# Altium PCB Power&CH340T.PcbDoc
Units mil, origin at the board's own origin, x right, y up, seen from the top; angles counter-clockwise.
Board outline 1295 x 1295 mil, 2 copper layers (Top Layer, Bottom Layer); 28 components, 23 nets, 119 pads, 61 vias.
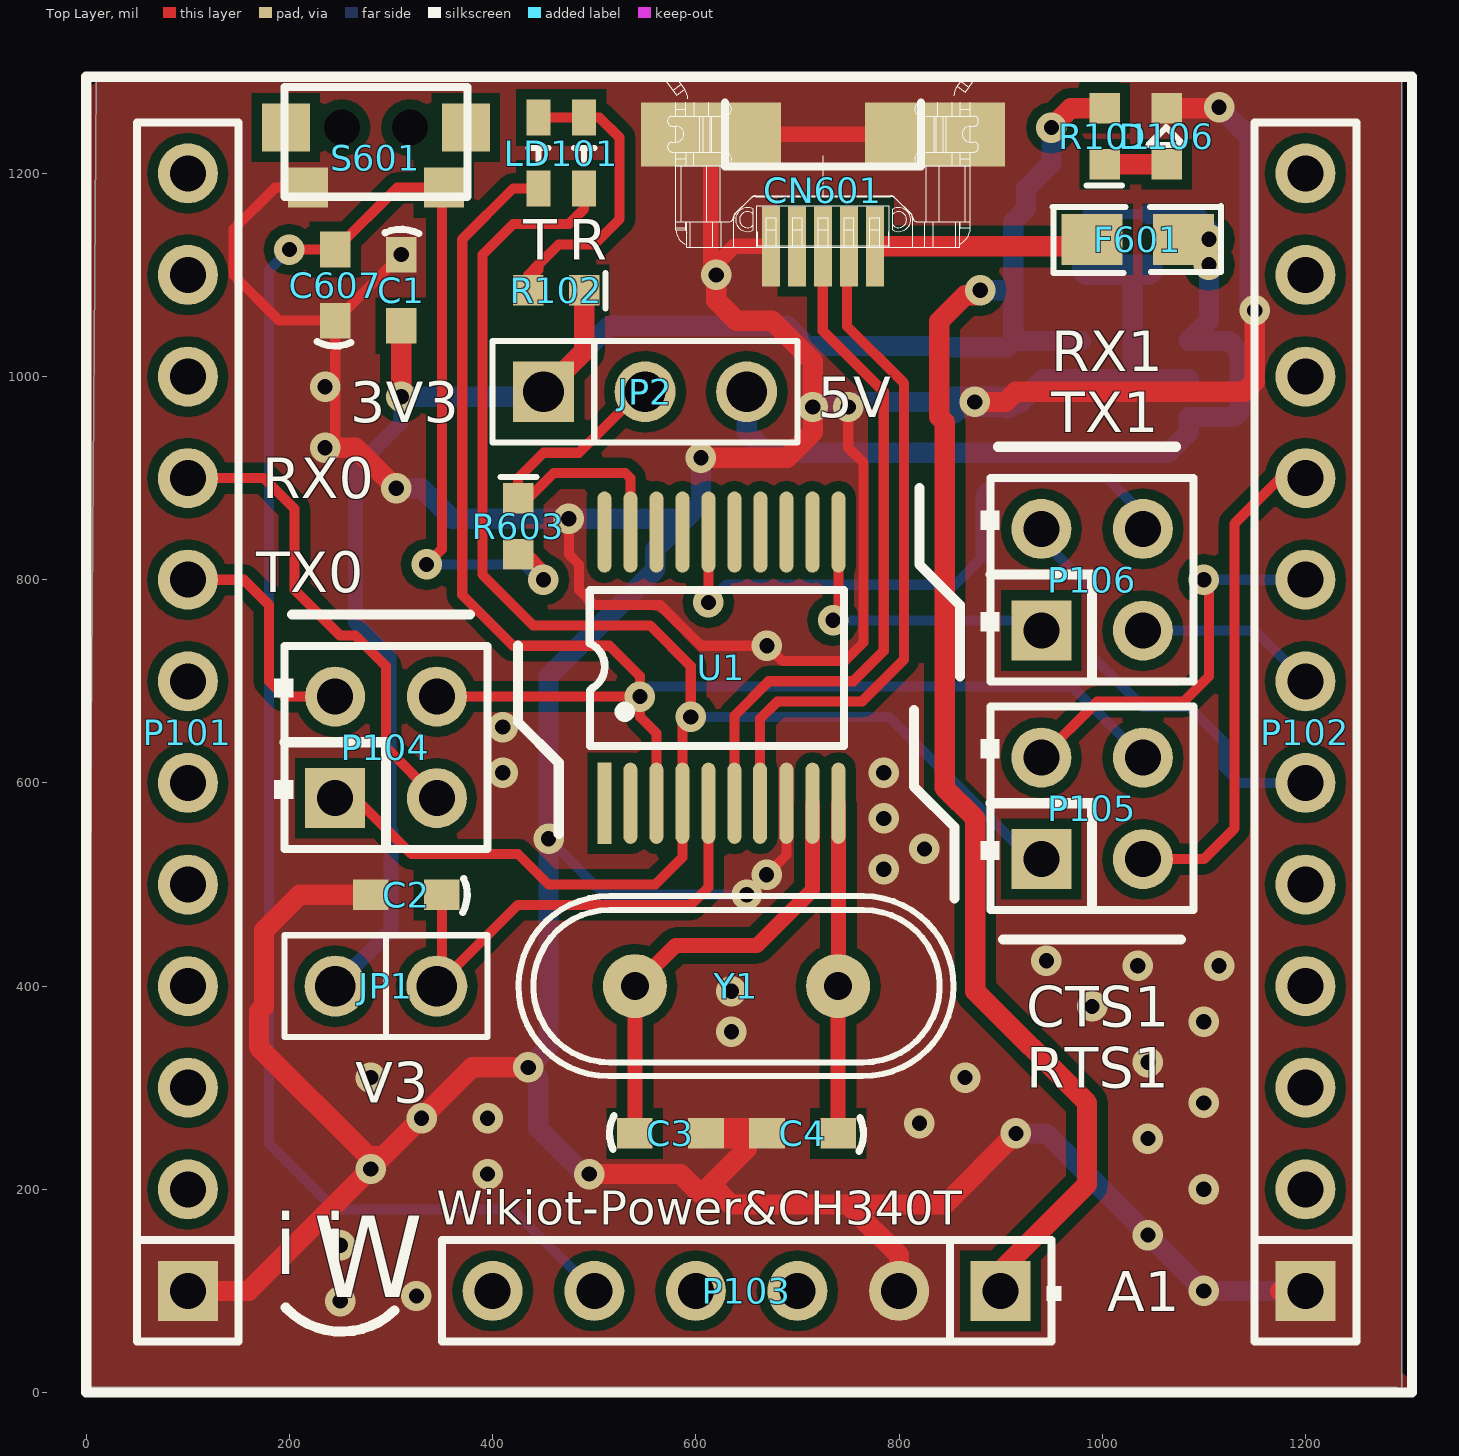
[diagram p0: Top Layer view]
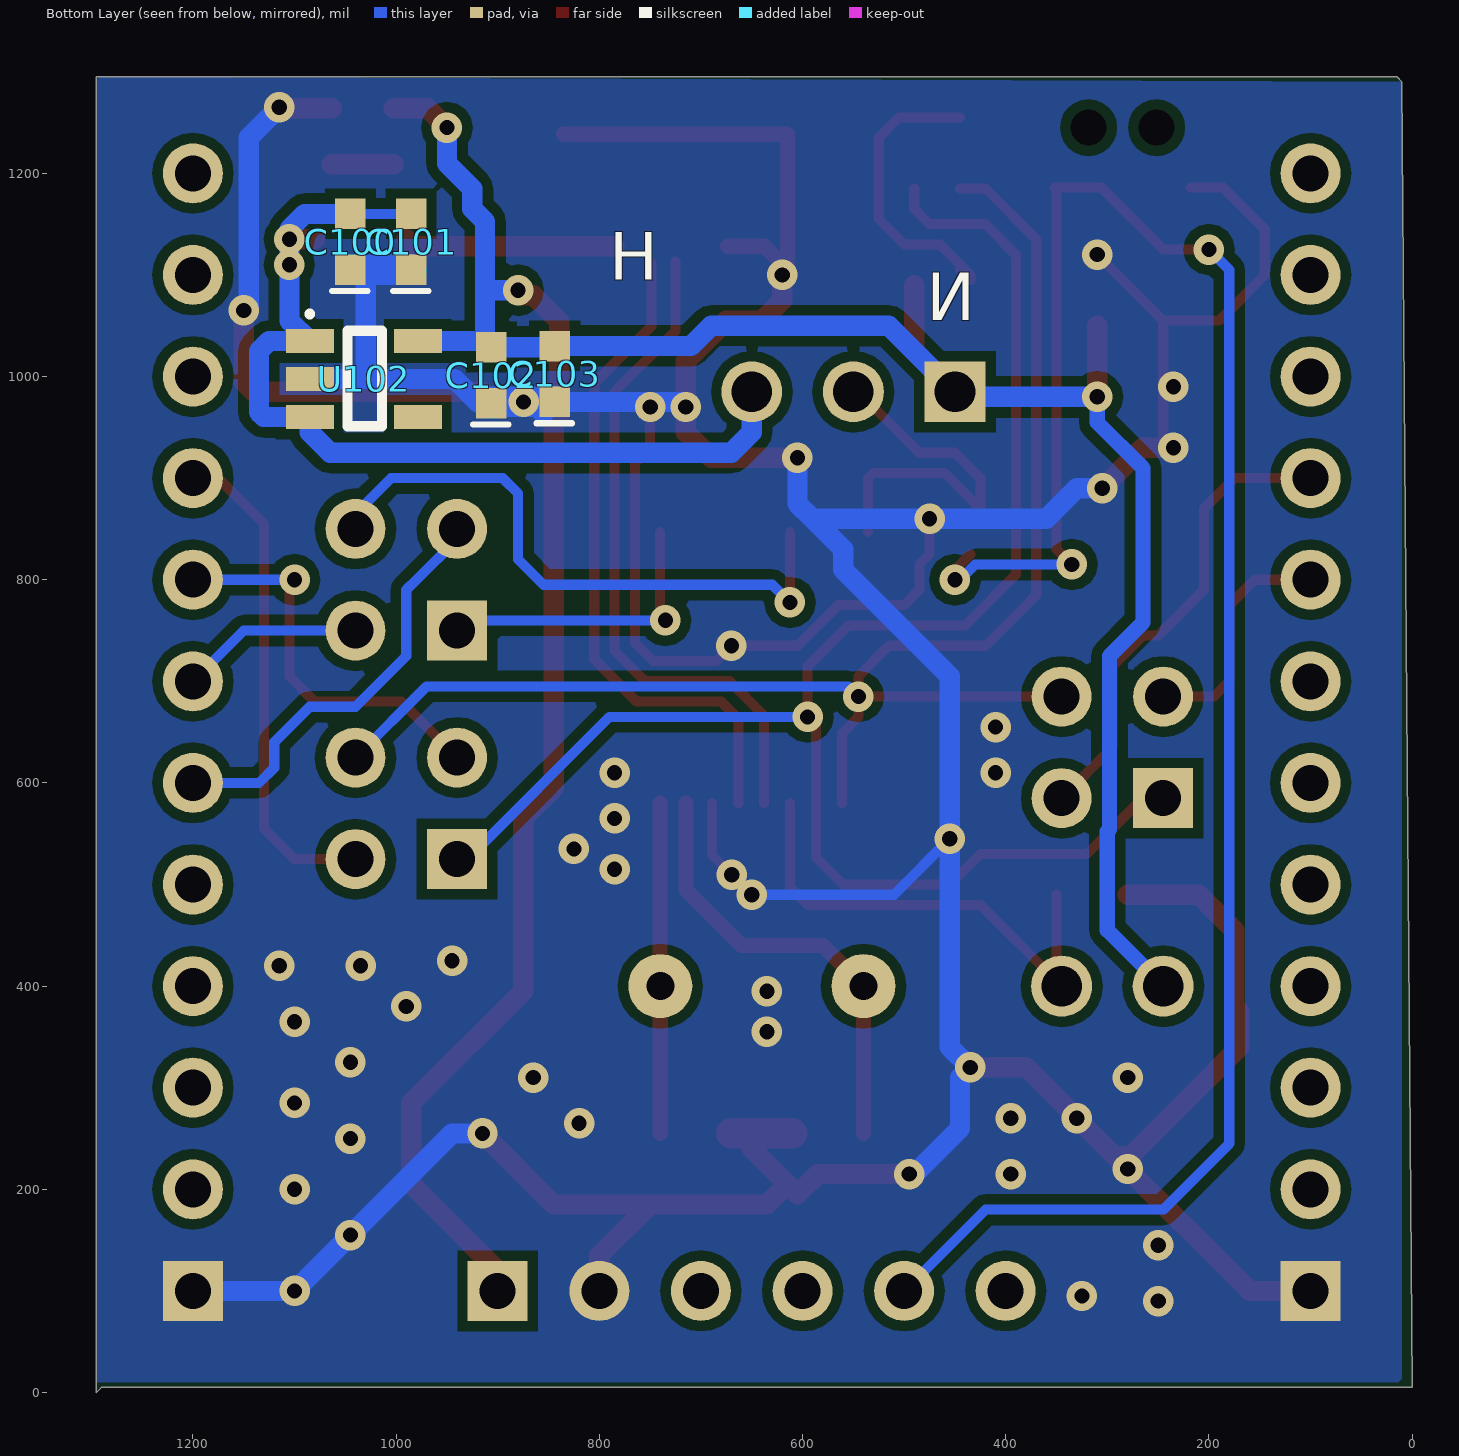
[diagram p1: Bottom Layer view, seen from below]

## Layer stack, top to bottom
Top Solder: solder mask 0.4, Solder Resist, Dk 3.5
Top Layer: signal copper 1.4
Dielectric1: dielectric 12.6, FR-4, Dk 4.8
Bottom Layer: signal copper 1.4
Bottom Solder: solder mask 0.4, Solder Resist, Dk 3.5

## Board outline
10,1290 15,1295 1295,1295 1295,0 1290,5 0,5

## Design rules (kind name [scope] priority, off if disabled: settings)
Clearance [All] p1: gap=10
ComponentClearance [All] p1: gap=10 collisioncheckmode=3 verticalgap=100000 showdistances=FALSE
HoleSize [All] p1: absolutevalues=TRUE maxlimit=1000 minlimit=1 maxpercent=80.000 minpercent=20.000
HoleToHoleClearance [All] p1: gap=0 allowstackedmicrovias=TRUE
MinimumSolderMaskSliver [All] p1: minsoldermaskwidth=0
PlaneConnect [All] p1: planeconnectstyle=Direct reliefexpansion=20 reliefentries=4 reliefconductorwidth=10 reliefairgap=10
PolygonConnect [All] p1: connectstyle=Direct reliefconductorwidth=10 reliefentries=4 polygonreliefangle="90 Angle" airgapwidth=10
RoomDefinition Power&CH340T [InComponentClass('Power&CH340T')] p1: confinementstyle=ConfineIn formatcopy=TRUE lockcomponents=FALSE outline 1305,1295 1.92,1295 1.92,-0.79 1305,-0.79
RoutingVias [All] p1: holewidth=28 width=50 viastyle="Through Hole" minholewidth=10 minwidth=20 maxholewidth=28 maxwidth=50
SilkToSilkClearance [All] p1: silktosilkclearance=0
SilkToSolderMaskClearance SilkscreenOverComponentPads [IsPad] p1: minsilkscreentomaskgap=0 clearancetoexposedcopper=TRUE
SolderMaskExpansion [All] p1: expansion=4
UnpouredPolygon [All] p1: allowunpoured=FALSE
Width [All] p1: maxlimit=10000 minlimit=10 preferedwidth=10
22 further rules are at their usual default settings.

## Components (designator, comment, footprint, x,y, rotation, side; value= is the part's Value field where it differs from the comment)
C1 "Cap" C0603L 310,1085 r270 top
C2 "Cap" C0603L 315,490 r180 top
C3 "Cap" C0603L 575,255 r0 top
C4 "Cap" C0603L 705,255 r180 top
C100 "1uF" 0603M 1045,1105 r90 bottom
C101 "0.1uF" 0603M 985,1105 r90 bottom
C102 "1uF" 0603M 906.44,973.92 r90 bottom
C103 "0.1uF" 0603M 843.8,975 r90 bottom
C607 "1uF" C0603L 245,1090 r90 top
CN601 "USB-Micro" USB-MICRO-Female-Lite 725,1235 r0 top
D106 "RED" 0603pn 1063.36,1208.92 r90 top
F601 "500mA" 0805 1080,1135 r180 top
JP1 "Jumper2-2" SIP2 345,400 r180 top
JP2 "Jumper3" SIP3 450,985 r0 top
LD101 "LTST-C195KGJRKT" 0805-LED-Bi 465,1180 r90 top
P101 "Synio Header-L 12-Pin" HDR1X12 100,100 r90 top locked
P102 "Synio Header-R 12-Pin" HDR1X12 1200,100 r90 top locked
P103 "Synio Power Header 6 Pin" HDR1X6/2.54MM 900,100 r180 top locked
P104 "Header 2X2" HDR2X2/2.54MM 245,585 r0 top
P105 "Header 2X2" HDR2X2/2.54MM 940,525 r0 top
P106 "Header 2X2" HDR2X2/2.54MM 940,750 r0 top
R101 "1K" 0603M 1002.36,1208.92 r90 top
R102 "1K" 0603M 490,1085 r180 top
R603 "10K" 0603M 425,880 r270 top
S601 "RESET" KEY-2x4-SMD 285,1245 r0 top
U1 "CH340T" SSOP20 610,705 r0 top
U102 "LDO" SOT23-5 1085,1035 r270 bottom
Y1 "XTAL" XTAL_49S 640,400 r0 top

## Footprints (in the part's own frame and the unit in brackets; to place one, negate y for a bottom-side part, rotate by r counter-clockwise, add the part's x,y. Pads: shape width x height; smd on the part's side, far side on the other; paste and mask are expansions set on the pad)
0603M [mil]
  rect 30x30 smd: 1(0,0) 2(55,0)
  silkscreen extent -21,-17 -21,18, body extent -5,-15 60,15, height 43
0603pn [mil]
  rect 30x30 smd: 1(0,0) 2(55,0)
  silkscreen extent 19,-17 36,18
0805 [mil]
  rect 60x50 smd: 1(0,0) 2(90,0)
  silkscreen extent -37,-33 129,33
0805-LED-Bi [mm]
  rect 0.9x0.6 smd: 1(0.127,-0.635) 2(0.127,0.508) 3(1.905,0.508) 4(1.905,-0.635)
  silkscreen extent 0.76,-0.89 1.14,0.76, body extent 0.32,-1.02 1.72,0.9, height 1.1
C0603L [mil]
  rect 35x30 smd: 1(-35,0) 2(35,0)
  silkscreen extent -60,-16 -56,18, body extent -31,-16 32,15, height 24
HDR1X6/2.54MM [mm] "Connector; Header; 6 Position"
  rect 1.5x1.5 hole 0.9: 1(0,0)
  round 1.5 hole 0.9: 2(2.54,0) 3(5.08,0) 4(7.62,0) 5(10.16,0) 6(12.7,0)
  silkscreen extent -1.52,-1.27 13.97,1.27
HDR1X12 [mm] "Connector; Header; 12 Position"
  rect 1.5x1.5 hole 0.9: 1(0,0)
  round 1.5 hole 0.9: 2(2.54,0) 3(5.08,0) 4(7.62,0) 5(10.16,0) 6(12.7,0) 7(15.24,0) 8(17.78,0) 9(20.32,0) 10(22.86,0) 11(25.4,0) 12(27.94,0)
  silkscreen extent -1.27,-1.27 29.21,1.27
HDR2X2/2.54MM [mm] "Connector; Header; 2x2 Position"
  rect 1.5x1.5 hole 0.9: 1(0,0)
  round 1.5 hole 0.9: 2(0,2.54) 3(2.54,0) 4(2.54,2.54)
  silkscreen extent -1.52,-1.27 3.81,3.81
KEY-2x4-SMD [mm] "6.8MM,2.8MM,SMD"
  rect 1.2x1.2 smd: 0(-2.25,0) 0(2.25,0)
  rect 1x1 smd: 1(-1.7,-1.5) 2(1.7,-1.5)
  round 0.8 hole 0.9 unplated: MH1(0.85,0) MH2(-0.85,0)
  silkscreen extent -2.29,-1.73 2.29,1.02, body extent -2.28,-1.6 2.29,0.94, height 1.1
SIP2 [mil]
  round 60 hole 40: 1(0,0) 2(100,0)
  silkscreen extent -50,-50 150,50
SIP3 [mil]
  rect 60x60 hole 40: 1(0,0)
  round 60 hole 40: 2(100,0) 3(200,0)
  silkscreen extent -50,-50 250,50
SOT23-5 [mm]
  rect 0.6x1.2 smd: 1(0,0) 2(0.95,0) 3(1.9,0) 4(1.9,2.7) 5(0,2.7)
  silkscreen extent -0.69,0 2.13,1.8, body extent -0.32,0.7 2.35,2.1, height 1.1
SSOP20 [mm]
  rect 0.35x2.032 smd: 1(-2.54,-3.175)
  oval 0.35x2.032 smd: 2(-1.89,-3.175) 3(-1.24,-3.175) 4(-0.59,-3.175) 5(0.06,-3.175) 6(0.71,-3.175) 7(1.35,-3.175) 8(2.01,-3.175) 9(2.66,-3.175) 10(3.31,-3.175) 11(3.31,3.606) 12(2.66,3.606) 13(2.01,3.606) 14(1.36,3.606) 15(0.71,3.606) 16(0.06,3.606) 17(-0.59,3.606) 18(-1.24,3.606) 19(-1.89,3.606) 20(-2.54,3.606)
  silkscreen extent -2.91,-1.75 3.45,2.15
USB-MICRO-Female-Lite [mm] "Connector; USB2.0, Type B, SM; 5 Position; Right Angle"
  rect 3.5x1.6 smd: 0(-2.802,0.088) 0(2.798,0.088)
  rect 0.45x2 smd: 1(1.298,-2.714) 2(0.648,-2.714) 3(-0.002,-2.714) 4(-0.652,-2.714) 5(-1.302,-2.714)
  silkscreen extent -3.92,-2.74 3.88,1.65
XTAL_49S [mm] "Hole 1.6mm"
  round 1.6 hole 0.7: 1(2.54,0) 2(-2.54,0)
  silkscreen extent -5.45,-2.25 5.42,2.25

## Part data
C1 C2 C3 C4: "Capacitor"
C100 C101 C102 C103 C607: library part Cap, "Capacitor"
D106: library part LED0, "Typical INFRARED GaAs LED"
F601: library part "Fuse 1", "Fuse"
JP1: "Jumper2"
LD101: "Avago, HSMF-A203 Bi-Color LED"
P101: "Synio Header-L, 12-Pin"
P102: "Synio Header-R, 12-Pin"
P104 P105 P106: "Header, 2-Pin, Dual row"
R101 R102 R603: library part Res2, "Resistor"
S601: library part SW-PB, "Switch"
U102: library part LDO-SOT23-5, "General LDO SOT23-5"
Y1: "Crystal Oscillator"

## Via types
v1: diameter 30, hole 15, Top Layer to Bottom Layer, 61 vias

## Nets (pads, with @x,y where several pads share a name; then routed paths per layer and width w, separated by ;. In a path a pad name is that pad's centre, name@x,y a point inside that pad or via, vN(x,y) a via of type N, cw(c..) or ccw(c..) an arc to the next point about the centre after c; other vN are vias at no path point)
CH_CTS: P106.1 U1.11 | length 298.3
  Top Layer w10: v1(735,760) 740.32,765.32 U1.11
  Bottom Layer w10: v1(735,760) 930,760 P106.1
CH_RTS: P106.4 U1.16 | length 615.2
  Top Layer w10: v1(612.36,777.64) U1.16
  Bottom Layer w10: v1(612.36,777.64) 629.72,795 855,795 880,820 880,885 895,900 1005,900 1040,865 P106.4
CH_RX: LD101.1 P104.1 P105.1 U1.4 | length 1688.6
  Top Layer w10: P104.1 265,585 320,530 425,530 455,500 560,500 586.77,526.77 U1.4 586.77,660 591.77,655 595,658.23 v1(595,665) 595,715 555,755 440,755 390,805 390,1120 420,1150 475,1150 490,1165 LD101.1
  Bottom Layer w10: v1(595,665) 790,665 930,525 P105.1
CH_TX: LD101.2 P104.4 P105.4 U1.3 | length 1513.7
  Top Layer w10: P104.4 v1(545,685) ; LD101.2 420,1185 370,1135 370,785 420,735 515,735 545,705 v1(545,685) ; U1.3 561.18,648.82 545,665 v1(545,685)
  Bottom Layer w10: v1(545,685) 555,695 970,695 P105.4
CH_VDD: JP2.2 R603.1 U1.19 | length 352.1
  Top Layer w10: U1.19 535.59,900 530.59,905 460,905 425,870 425,900 450,925 485,925 535,975 JP2.2@535.59,974.41
CTS1: P102.7 P106.3 | length 180.7
  Bottom Layer w10: P106.3 1150,750 P102.7
D3V3: C1.2 C102.2 C103.2 JP1.2 JP2.1 P103.1 R101.2 R102.1 U102.5 | length 2959.8
  Top Layer w20: v1(310,980) C1.2 ; JP2.1 490,1025 R102.1@490,1090 ; v1(880,1085) 875,1080 865,1080 839.58,1054.58 839.58,1034.58 839.58,960.5 845,955.08 845,595 875,565 875,395 985,285 985,205 900,120 P103.1 ; v1(950,1245) 968.92,1263.92 R101.2
  Bottom Layer w15: JP1.2 300,455 300,552.22 297.97,554.25 297.97,725 265,757.97 265,910 310,955 v1(310,980)
  Bottom Layer w20: v1(310,980) 445,980 JP2.1 515,1050 690,1050 710,1030 C103.2 844.87,1028.92 C102.2 C102.2@912.52,1035 ; v1(880,1085) 907.52,1085 912.52,1080 ; v1(950,1245) 950,1210 925,1185 925,1165 912.52,1152.52 912.52,1080 ; U102.5 C102.2@912.52,1035 ; C102.2@912.52,1035 912.52,1080
D5V: C100.2 C101.2 F601.1 JP2.3 U102.1 U102.3 | length 942.4
  Top Layer w20: F601.1 v1(1105,1135)
  Bottom Layer w10: C101.2 C100.2
  Bottom Layer w20: JP2.3 650,945 670,925 1065,925 1085,945 U102.3 1130.2,960.2 1135,965 1135,1025 1125,1035 U102.1 1105,1055 v1(1105,1135) 1105,1145 1090,1160 C100.2
  other v1: 1105,1110
D+: CN601.3 U1.6 | length 667.7
  Top Layer w10: U1.6 637.95,666.24 671.72,700 755,700 785,730 785,985 724.94,1045.06 CN601.3@724.94,1113.14
D-: CN601.2 U1.7 | length 664.7
  Top Layer w10: U1.7 663.15,663.15 680,680 763.28,680 805,721.72 805,993.28 748.8,1049.49 748.8,1111.41 CN601.2@750.53,1113.14
GND: C1.1 C2.2 C3.2 C4.2 C100.1 C101.1 C102.1 C103.1 C607.1 CN601.0 CN601.5 D106.2 P101.1 P102.1 P103.2 S601.1 U1.8 U102.2 | length 6485
  Top Layer w10: S601.1 185.94,1185.94 145,1145 145,1100 190,1055 C607.1 ; v1(235,930) 245,940 C607.1 ; v1(310,1120) C607.1 ; v1(475,860) 475,825 485,815 485,790 500,775 565,775 605,735 v1(670,735) 685,720 746.72,720 765,738.28 765,915 750,930 v1(750,970) ; v1(650,490) 689.13,529.13 U1.8
  Top Layer w15: CN601.5 637.54,1128.14 614.7,1105.3 614.7,1238.46 CN601.0@835.17,1238.46
  Top Layer w20: P101.1 160,100 292.5,232.5 ; v1(235,930) 265,930 v1(305,890) ; C2.2 210,490 175,455 175,380 170,375 170,340 277.5,232.5 292.5,232.5 ; v1(435,320) 380,320 292.5,232.5 ; v1(495,215) 585,215 605,195 615,205 ; v1(605,920) 690,920 715,945 v1(715,970) 715,1015 675,1055 640,1055 620,1075 v1(620,1100) ; 650,255 650,240 615,205 ; P103.2 800,135 750,185 ; v1(874.58,975) 905,975 915,985 1140,985 1150,995 v1(1150,1065) ; v1(915,255) 845,185 750,185 ; D106.2 1113.92,1263.92 v1(1115,1265) ; P102.1@1175,100 P102.1 ; 615,205 635,185 750,185
  Top Layer w30: C3.2 650,255 C4.2
  Bottom Layer w10: v1(455,545) 510,490 v1(650,490)
  Bottom Layer w20: v1(305,890) 330,890 360,860 v1(475,860) 590,860 ; v1(495,215) 490,215 445,260 445,310 v1(435,320) 455,340 v1(455,545) 455,705 560,810 560,830 590,860 ; v1(605,920) 605,875 590,860 ; v1(715,970) 720,975 C103.1 855,963.8 866.2,975 v1(874.58,975) ; C102.1 918.92,973.92 942.6,997.6 1020,997.6 ; v1(915,255) 945,255 v1(1100,100) P102.1 ; C100.1@1030,1105 1030,1007.6 1020,997.6 ; U102.2 1020,997.6 ; v1(1115,1265) 1145,1235 1145,1070 v1(1150,1065)
  Bottom Layer w30: C103.1 905.36,975 C102.1 ; C101.1 1025,1105 ; C100.1@1030,1105 C100.1
  other v1: 250,90 325,95 250,145 1045,155 1100,200 395,215 280,220 1045,250 820,265 330,270 395,270 1100,285 280,310 865,310 1045,325 635,355 1100,365 990,380 635,395 1035,420 1115,420 945,425 669.57,509.57 785,515 825,535 785,565 410,610 785,610 410,655 235,990
NetC2_1: C2.1 JP1.1 U1.5 | length 475.3
  Top Layer w10: JP1.1 JP1.1@350,405 ; C2.1 JP1.1@350,405 ; U1.5 612.36,497.36 595,480 425,480 JP1.1@350,405
NetC3_1: C3.1 U1.9 Y1.2 | length 444.2
  Top Layer w15: C3.1 Y1.2 580,440 660,440 714.72,494.72 U1.9
NetC4_1: C4.1 U1.10 Y1.1 | length 325.1
  Top Layer w15: C4.1 Y1.1 740.32,400.32 U1.10
NetCN601_1: CN601.1 F601.2 | length 207.8
  Top Layer w20: 785,1128.14 983.14,1128.14 F601.2
NetD106_1: D106.1 R101.1 | length 61
  Top Layer w20: R101.1 D106.1
NetLD101_3: LD101.3 LD101.4 R102.2 | length 305.2
  Top Layer w10: LD101.3 LD101.4 505,1255 525,1235 525,1155 510,1140 500,1130 465,1130 445,1110 ; 445,1110 435,1100 435,1095 445,1105 445,1110
NRST: C607.2 P103.5 R603.2 S601.2 | length 1983
  Top Layer w10: v1(200,1125) C607.2 305.95,1185.94 S601.2 350,1184.02 350,830 v1(335,815) ; R603.2@435,825 450,810 v1(450,800)
  Bottom Layer w10: v1(200,1125) 180,1105 180,245 245,180 420,180 P103.5 ; v1(335,815) 430,815 450,795 v1(450,800)
RTS1: P102.6 P106.2 | length 422.1
  Bottom Layer w10: P106.2 940,840 980,800 990,790 990,725 1040,675 1085,675 1120,640 1120,615 1135,600 P102.6
RX0: P101.9 P104.3 | length 469.2
  Top Layer w10: P101.9 175,900 205,870 205,790 250,745 265,745 295,715 295,635 P104.3
RX1: P102.9 P105.3 | length 491.1
  Top Layer w10: P105.3 1100,525 1130,555 1130,855 1175,900 P102.9
TX0: P101.8 P104.2 | length 236.6
  Top Layer w10: P101.8 130,800 155,800 180,775 180,750 180,700 195,685 P104.2
TX1: P102.8 P105.2 | length 398.1
  Top Layer w10: P105.2 995,680 1080,680 1105,705 1105,800 v1(1100,800)
  Bottom Layer w10: v1(1100,800) P102.8
pads on no net: CN601.4 P101.2 P101.3 P101.4 P101.5 P101.6 P101.7 P101.10 P101.11 P101.12 P102.2 P102.3 P102.4 P102.5 P102.10 P102.11 P102.12 P103.3 P103.4 P103.6 S601.0 S601.MH1 S601.MH2 U1.1 U1.2 U1.12 U1.13 U1.14 U1.15 U1.17 U1.18 U1.20 U102.4

## Polygon pours and split planes (outlines as drawn)
GND on Top Layer "Top Layer-No Net" (solid, remove dead copper, pour order 6): 10,1290 1.92,1281.92 1.92,-0.79 1294.21,-0.79 1305,10 1295,20 1295,1295
GND on Bottom Layer "Top Layer-No Net" (solid, remove dead copper, pour order 8): 10,1290 10,10 1295,10 1295,1295

## Silkscreen, mask and mechanical layers (free items; w line width, h text height)
Top Overlay:
  lines w10: 196.28,83.58 ccw(c251.28,135.58) 303.28,80.58 ; 202.56,765.81 377.56,765.81 ; 425,735 425,660 465,620 465,550 ; 814.61,671.55 814.61,596.55 854.61,556.55 854.61,486.55 ; 820,890 820,815 860,775 860,705 ; 897.56,930.81 1072.56,930.81 ; 902.56,445.81 1077.56,445.81 ; 0,0 0,1295 1305,1295 1305,0 0,0
  text "T" at 430,1115 h40
  text "R" at 475,1115 h40
  text "RX1" at 950,1005 h40
  text "5V" at 720,960 h40
  text "3V3" at 260,955 h40
  text "TX1" at 950,945 h40
  text "RX0" at 173.31,880.07 h40
  text "TX0" at 167.5,787.5 h40
  text "CTS1" at 925,360 h40
  text "RTS1" at 925,300 h40
  text "V3" at 265,285 h40
  text "Wikiot-Power&CH340T" at 345,165 h33.46
  text "i i" at 185.28,116.58 h60
  text "W" at 223.28,93.58 h80
  text "A1" at 1005,80 h39.37
Bottom Overlay:
  text "H" at 790,1080 h80
  text "N" at 430,1040 h80